# Altium PCB SIM_NB_IoT.PcbDoc
Units mil, origin at the board's own origin, x right, y up, seen from the top; angles counter-clockwise.
Board outline 1968.5 x 1968.5 mil, 2 copper layers (Top Layer, Bottom Layer); 33 components, 30 nets, 142 pads, 16 vias.
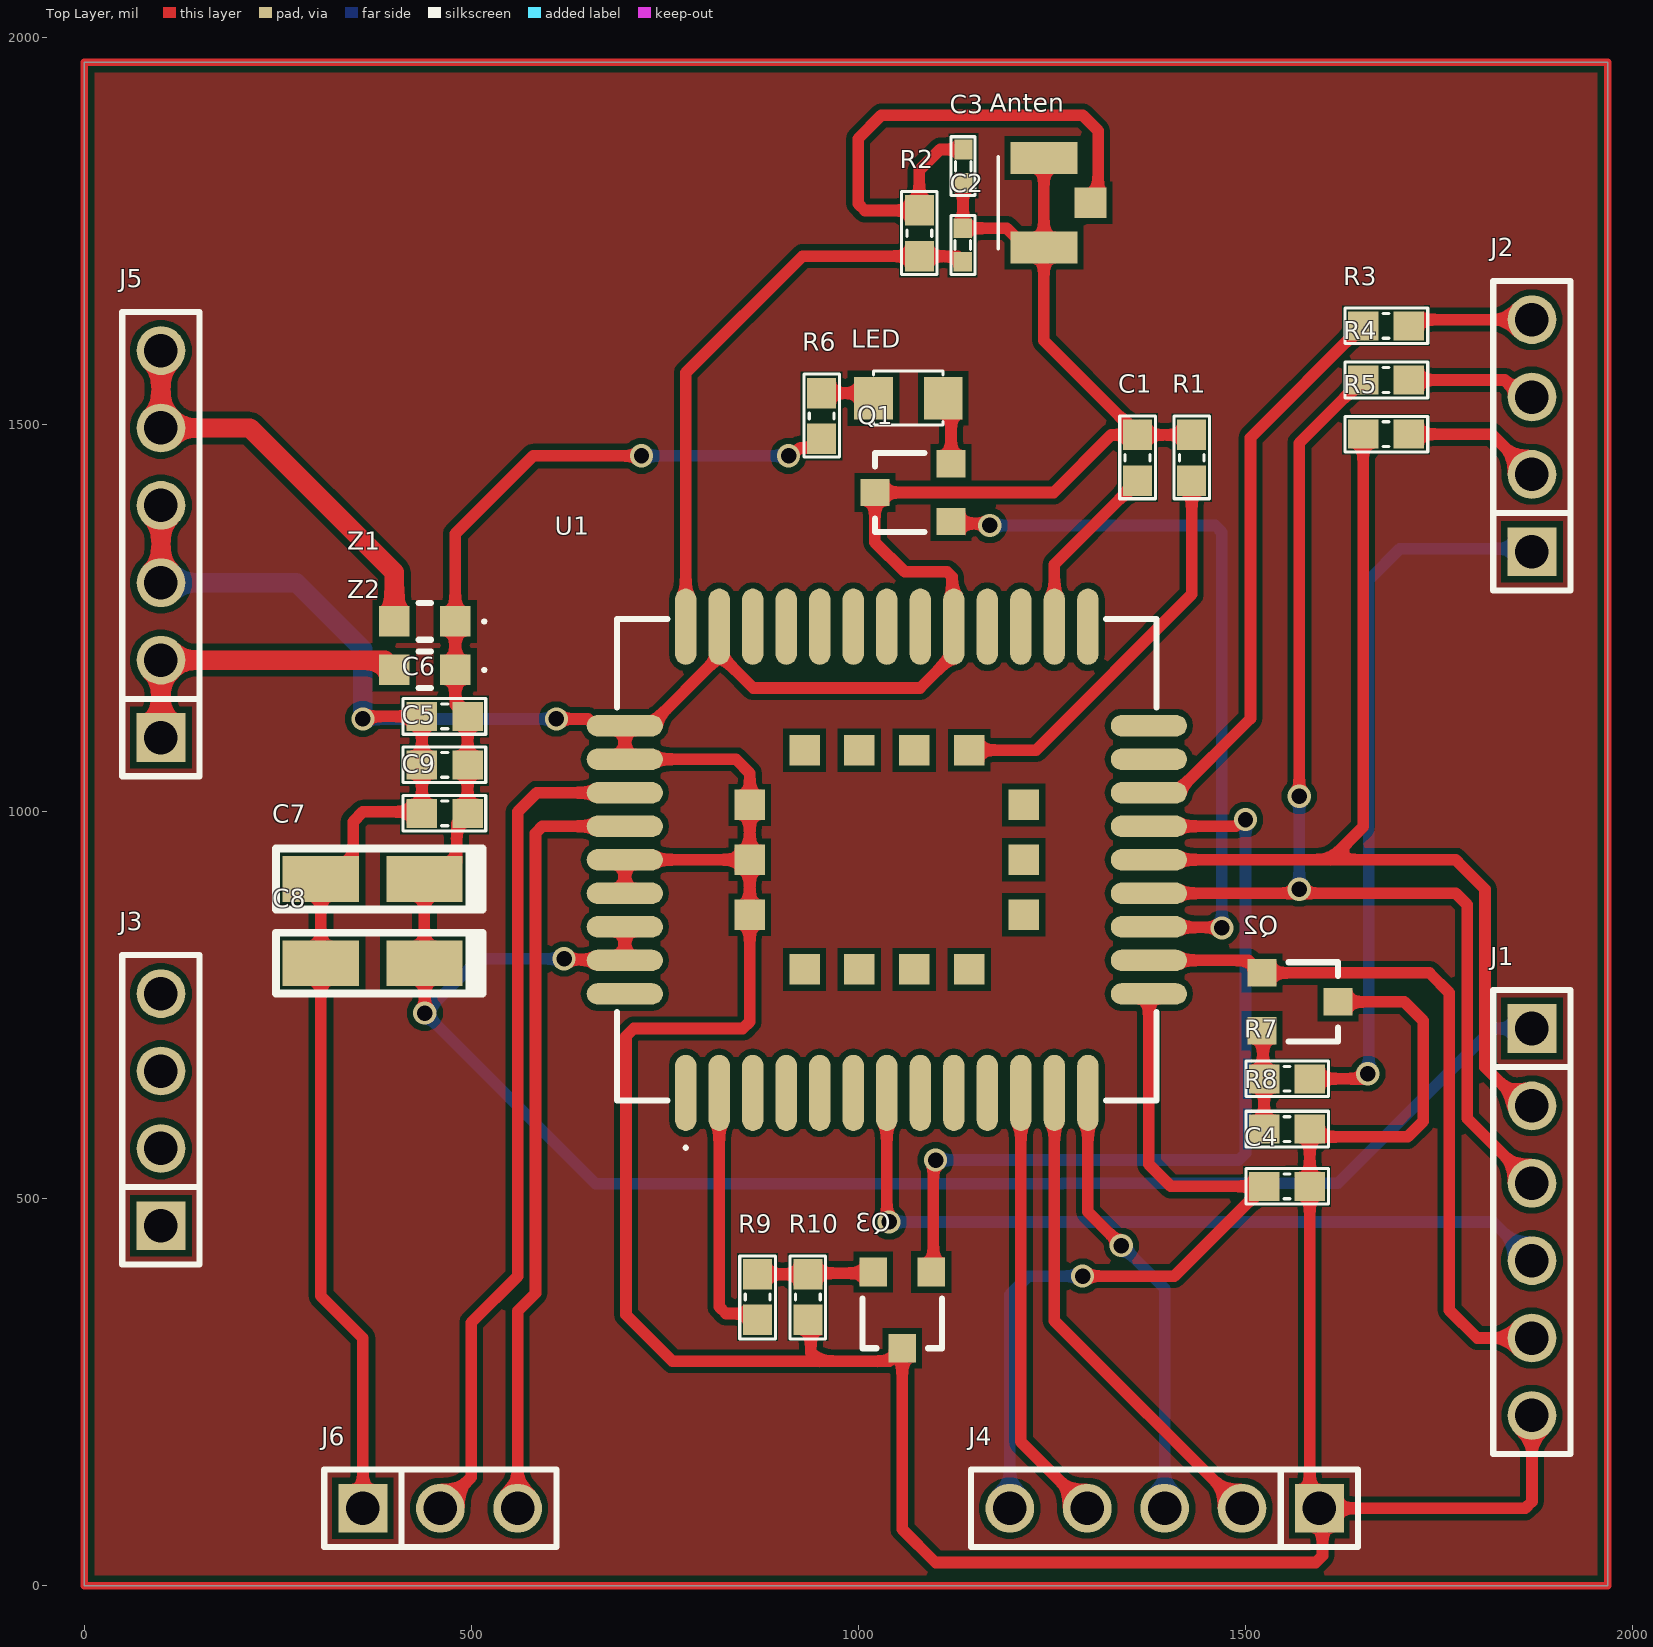
[diagram p0: Top Layer view]
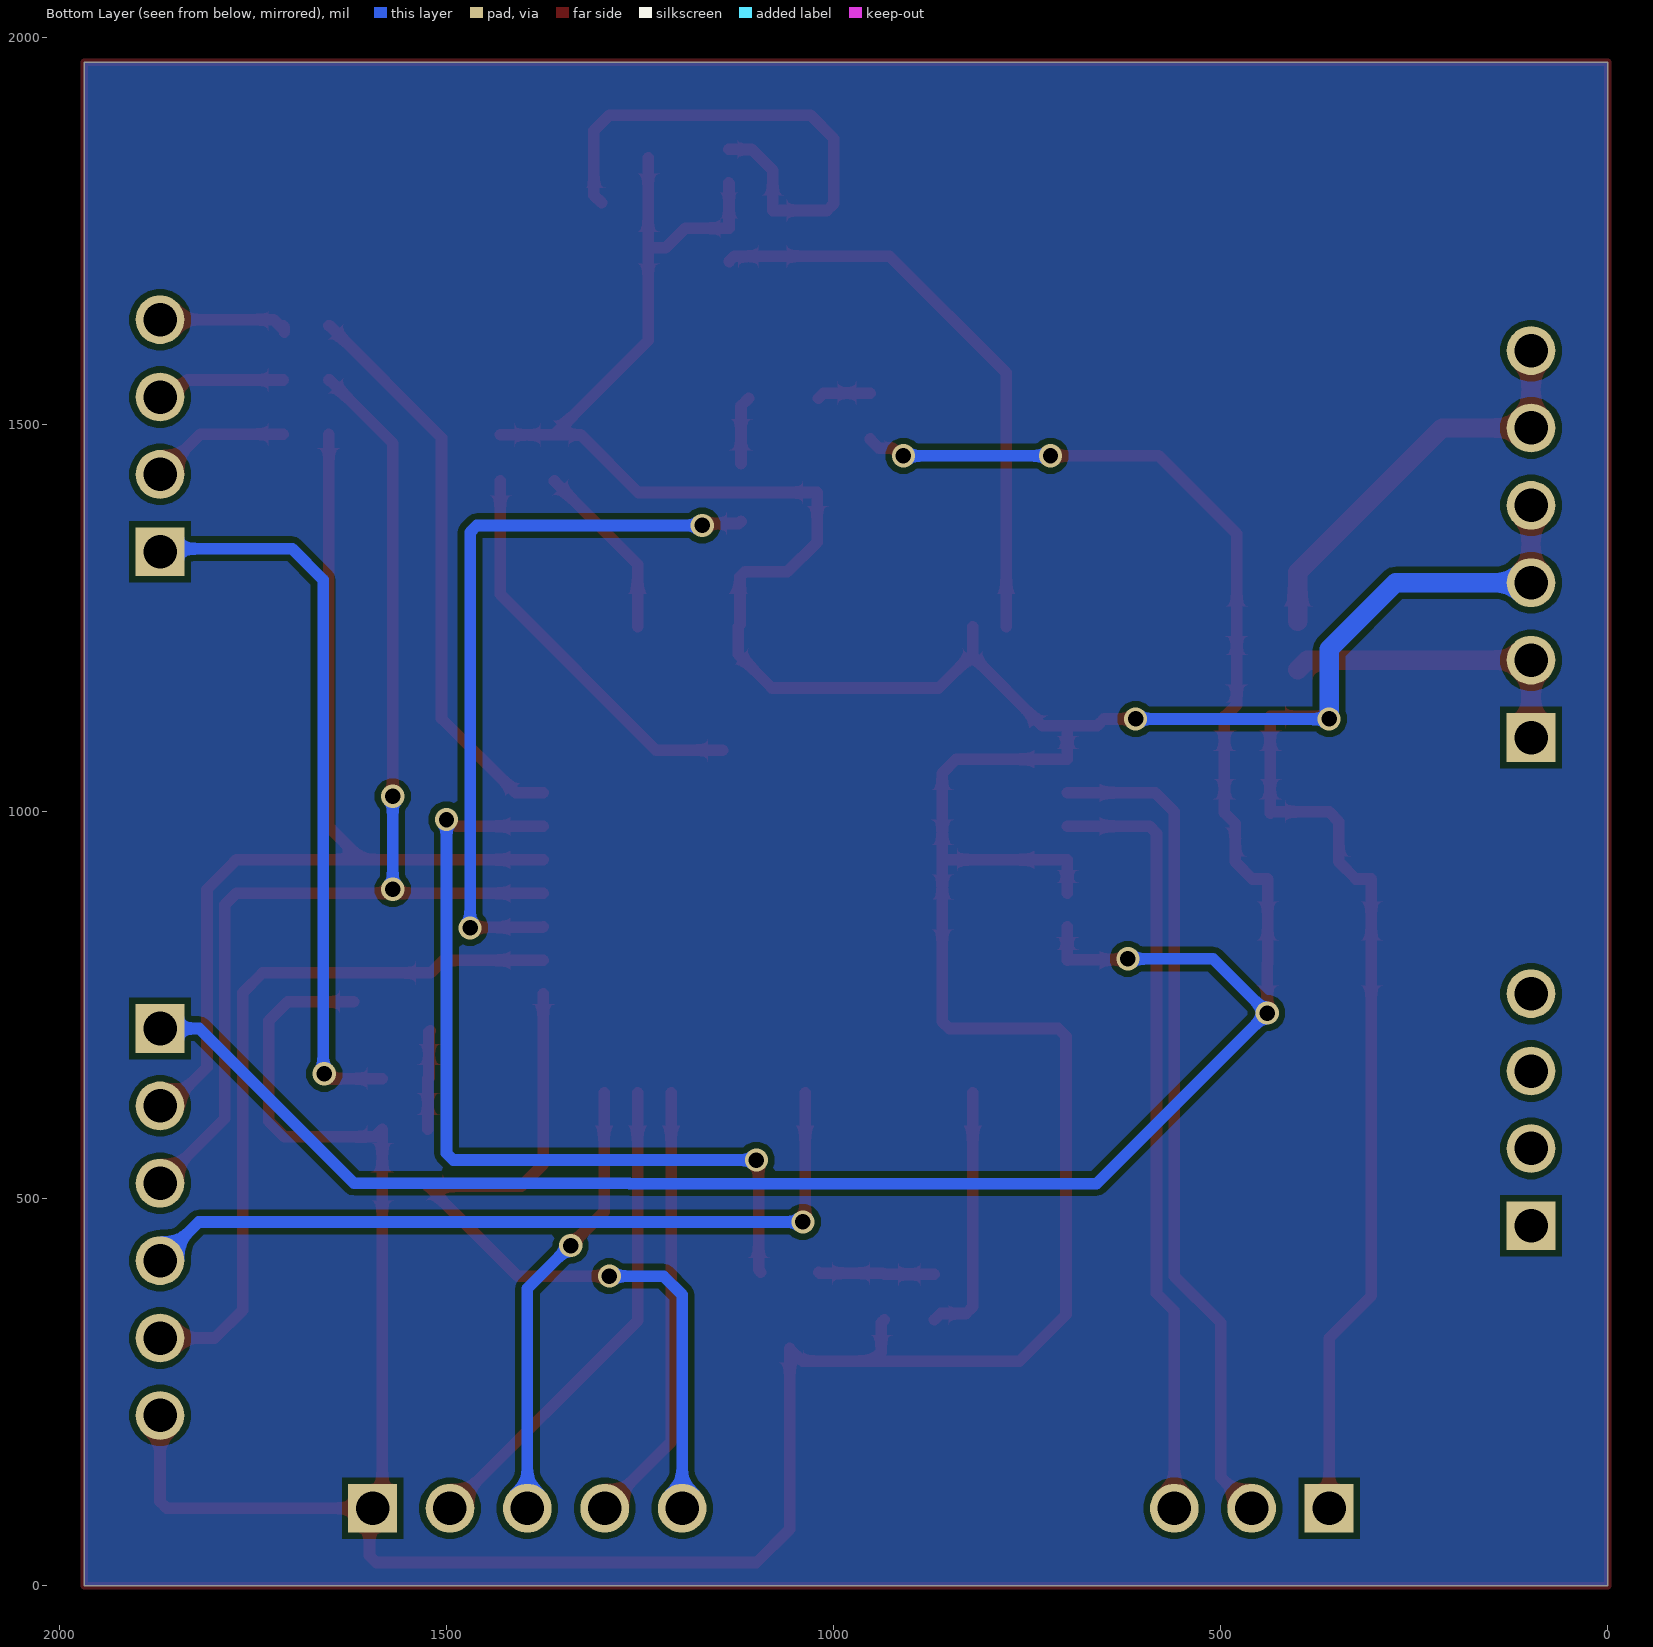
[diagram p1: Bottom Layer view, seen from below]
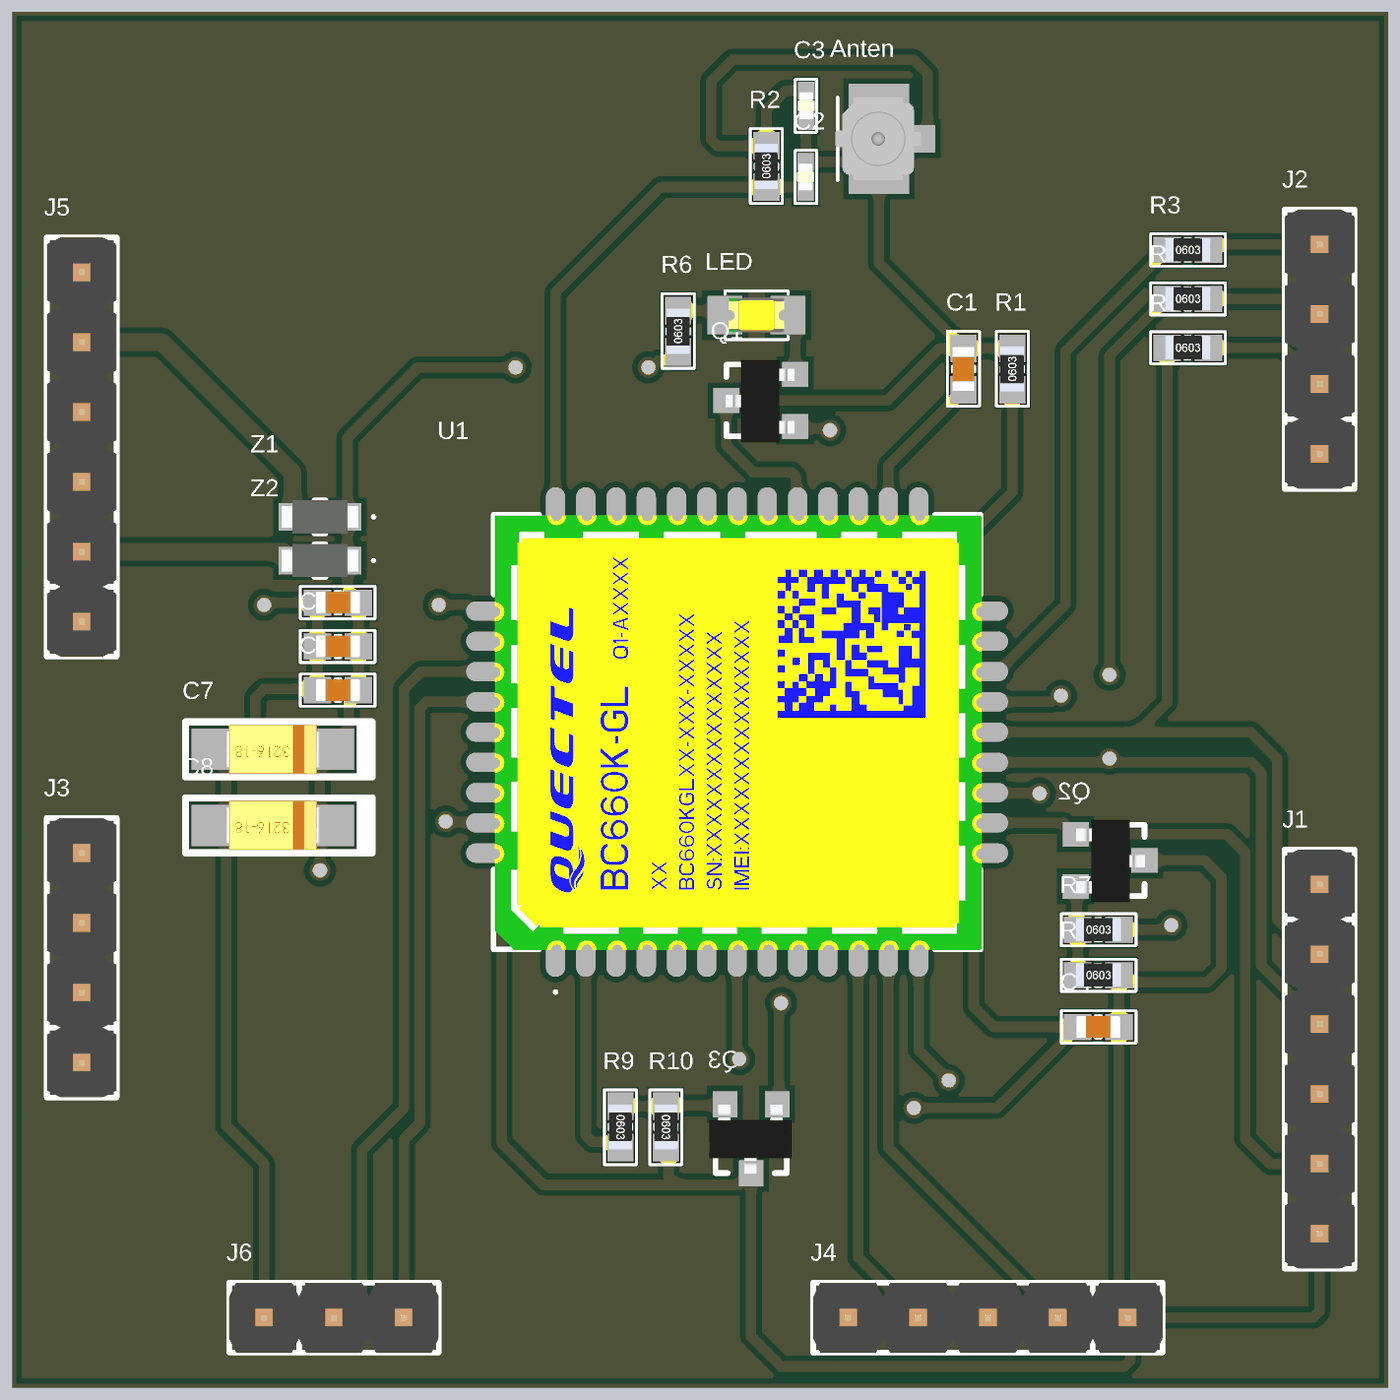
[diagram p2: 3D render of the assembled board from above, using the file's embedded part models]

## Layer stack, top to bottom
Top Solder: solder mask 0.4, Solder Resist, Dk 3.5
Top Layer: signal copper 1.4
Dielectric 1: dielectric 12.6, FR-4, Dk 4.8
Bottom Layer: signal copper 1.4
Bottom Solder: solder mask 0.4, Solder Resist, Dk 3.5

## Board outline
0,0 0,1968.5 1968.5,1968.5 1968.5,0

## Design rules (kind name [scope] priority, off if disabled: settings)
Clearance Clearance_1 [InPolygon] p1: gap=8 ignorepadtopadclearanceinfootprint=FALSE
Clearance [All] p2: gap=8 ignorepadtopadclearanceinfootprint=FALSE
PolygonConnect [All] p1: connectstyle=Relief reliefconductorwidth=10 reliefentries=4 polygonreliefangle="90 Angle" airgapwidth=10
RoutingVias [All] p1: holewidth=28 width=50 viastyle="Through Hole" minholewidth=10 minwidth=15 maxholewidth=20 maxwidth=30
SolderMaskExpansion [IsVia] p1: expansion=4 istentingtop=TRUE
Width [All] p1: maxlimit=25 minlimit=10 preferedwidth=15
30 further rules are at their usual default settings.

## Components (designator, comment, footprint, x,y, rotation, side; value= is the part's Value field where it differs from the comment)
Anten "1909763" TE_1909763-1 1240,1787 r90 top
C1 "105/50V/0603" "tu 0603" 1361,1457.53 r90 top
C2 "220nF" "tu 0402" 1135,1732.5 r270 top
C3 "220nF" "tu 0402" 1136,1834.35 r90 top
C4 "104/50V/0603" "tu 0603" 1554,516 r0 top
C5 "104/25V/0603" "tu 0603" 465.71,1060.64 r180 top
C6 "22pF/25V/0603" "tu 0603" 465.71,1123.28 r180 top
C7 "100uF/6.3V/2312" "tu tantalum smd3216" 372.54,913.23 r180 top
C8 "100uF/6.3V/2312" "tu tantalum smd3216" 372.54,804.49 r180 top
C9 "101/50V/0603" "tu 0603" 465.71,998 r180 top
J1 "JP 1x6 2.54" "JP 1x6 DT" 1870.67,720 r270 top
J2 "JP 1x4 2.54" "JP 1x4 DT" 1870.67,1336 r90 top
J3 "JP 1x4 2.54" "JP 1x4 DT" 99.02,465 r90 top
J4 "JP 1x5 2.54" "JP 1x5 DT" 1596,100 r180 top
J5 "JP 1x6 2.54" "JP 1x6 DT" 99,1096 r90 top
J6 "JP 1x3 2.54" "JP 1x3 DT" 360,100 r0 top
LED "LED 0805" LED-0805-Yellow 1019.79,1534.6 r0 top
Q1 "HF" SOT23#1 1070.79,1412.6 r90 top value=C9014
Q2 "HF" SOT23#2 1570.91,754.4 r90 top value=C9014
Q3 "HF" SOT23#2 1057,356 r0 top value=C9014
R1 "1001/0603" "tro smd 0603" 1431,1457.53 r90 top
R2 "0R0/0402" "tro smd 0603" 1079,1747.53 r90 top
R3 "1001/0603" "tro smd 0603" 1682,1628 r0 top
R4 "1001/0603" "tro smd 0603" 1682,1558 r0 top
R5 "1001/0603" "tro smd 0603" 1682,1488 r0 top
R6 "1001/0603" "tro smd 0603" 952.79,1511.6 r90 top
R7 "1001/0603" "tro smd 0603" 1554,655 r0 top
R8 "1002/0603" "tro smd 0603" 1554,590 r0 top
R9 "1001/0603" "tro smd 0603" 870,372.91 r270 top
R10 "1002/0603" "tro smd 0603" 935,372.91 r270 top
U1 "BC660K-GL" BC660KGL 1037,938 r90 top
Z1 "MU2029-151Y" MU2029151Y 440,1246 r180 top
Z2 "MU2029-151Y" MU2029151Y 440,1183.36 r180 top

## Footprints (in the part's own frame and the unit in brackets; to place one, negate y for a bottom-side part, rotate by r counter-clockwise, add the part's x,y. Pads: shape width x height; smd on the part's side, far side on the other; paste and mask are expansions set on the pad)
BC660KGL [mm]
  oval 2.5x0.7 smd: 1(-7.65,6.6) 2(-7.65,5.5) 3(-7.65,4.4) 4(-7.65,3.3) 5(-7.65,2.2) 6(-7.65,1.1) 7(-7.65,0) 8(-7.65,-1.1) 9(-7.65,-2.2) 10(-7.65,-3.3) 11(-7.65,-4.4) 12(-7.65,-5.5) 13(-7.65,-6.6) 23(7.65,-6.6) 24(7.65,-5.5) 25(7.65,-4.4) 26(7.65,-3.3) 27(7.65,-2.2) 28(7.65,-1.1) 29(7.65,0) 30(7.65,1.1) 31(7.65,2.2) 32(7.65,3.3) 33(7.65,4.4) 34(7.65,5.5) 35(7.65,6.6)
  oval 0.7x2.5 smd: 14(-4.4,-8.6) 15(-3.3,-8.6) 16(-2.2,-8.6) 17(-1.1,-8.6) 18(0,-8.6) 19(1.1,-8.6) 20(2.2,-8.6) 21(3.3,-8.6) 22(4.4,-8.6) 36(4.4,8.6) 37(3.3,8.6) 38(2.2,8.6) 39(1.1,8.6) 40(0,8.6) 41(-1.1,8.6) 42(-2.2,8.6) 43(-3.3,8.6) 44(-4.4,8.6)
  rect 1x1 smd: 45(-3.6,2.7) 46(-3.6,0.9) 47(-3.6,-0.9) 48(-3.6,-2.7) 49(-1.8,-4.5) 50(0,-4.5) 51(1.8,-4.5) 52(3.6,-2.7) 53(3.6,-0.9) 54(3.6,0.9) 55(3.6,2.7) 56(1.8,4.5) 57(0,4.5) 58(-1.8,4.5)
  silkscreen extent -9.5,-8.85 7.9,8.85, body extent -7.93,-8.89 7.87,8.81, height 1.98
"JP 1x3 DT" [mm]
  rect 1.6x1.6 hole 1.1: 1(0,0)
  round 1.6 hole 1.1: 2(2.54,0) 3(5.08,0)
  silkscreen extent -1.27,-1.27 6.35,1.27, body extent -1.27,-1.27 6.35,1.27, height 8.54
"JP 1x4 DT" [mm] "4 pins, 1 row, straight, gold plating"
  rect 1.6x1.6 hole 1.1: 1(0,0)
  round 1.6 hole 1.1: 2(2.54,0) 3(5.08,0) 4(7.62,0)
  silkscreen extent -1.27,-1.27 8.89,1.27, body extent -1.27,-1.27 8.89,1.27, height 8.54
"JP 1x5 DT" [mm] "5 pins, 1 row, straight, gold plating"
  rect 1.6x1.6 hole 1.1: 1(0,0)
  round 1.6 hole 1.1: 2(2.54,0) 3(5.08,0) 4(7.62,0) 5(10.16,0)
  silkscreen extent -1.27,-1.27 11.43,1.27, body extent -1.27,-1.27 11.43,1.27, height 8.54
"JP 1x6 DT" [mm] "6 pins, 1 row, straight, gold plating"
  rect 1.6x1.6 hole 1.1: 1(0,0)
  round 1.6 hole 1.1: 2(2.54,0) 3(5.08,0) 4(7.62,0) 5(10.16,0) 6(12.7,0)
  silkscreen extent -1.27,-1.27 13.97,1.27, body extent -1.27,-1.27 13.97,1.27, height 8.54
LED-0805-Yellow [mil]
  rect 50x55 smd: 1(0,0) 2(90,0)
  silkscreen extent 0,-35 90,35, body extent 5,-25 85,25, height 43
MU2029151Y [mm]
  rect 1x1 smd: 1(-1,0) 2(1,0)
  silkscreen extent -2,-0.6 0.2,0.6, body extent -1.4,-0.6 1.4,0.6, height 1.2
SOT23#1 [mm] "SOT23"
  rect 0.9x0.95 smd: 1(-0.95,-1.25) 2(0,1.25)
  rect 0.9x0.95 smd mask+0: 3(0.95,-1.25)
  silkscreen extent -1.3,-0.38 1.3,1.25, body extent -1.52,-1.23 1.48,1.27, height 1.06
SOT23#2 [mm] "SOT23"
  rect 0.9x0.95 smd: 1(-0.95,1.25) 2(0,-1.25)
  rect 0.9x0.95 smd mask+0: 3(0.95,1.25)
  silkscreen extent -1.3,-1.25 1.3,0.38, body extent -1.52,-1.27 1.48,1.23, height 1.06
TE_1909763-1 [mm]
  rect 1x1.05 smd: 1(0,-1.525)
  rect 1.05x2.2 smd: 2(-1.475,0) 3(1.475,0)
  silkscreen extent -1.5,1.5 1.5,1.5, body extent -1.5,-1.53 1.5,1.58, height 1.27
"tro smd 0603" [mm] "Chip Capacitor, 2-Leads, Body 1,60x0,80mm, IPC Medium Density"
  rect 1x0.95 smd mask+0.076: 1(-0.75,0) 2(0.75,0)
  silkscreen extent -1.35,-0.58 1.37,0.58, body extent -0.82,-0.42 0.82,0.43, height 0.44
"tu 0402" [mm]
  rect 0.65x0.6 smd: 1(-0.55,0) 2(0.55,0)
  silkscreen extent -0.97,-0.38 0.97,0.41, body extent -0.5,-0.27 0.5,0.26, height 0.35
"tu 0603" [mm] "Chip Capacitor, 2-Leads, Body 1,60x0,80mm, IPC Medium Density"
  rect 1x0.95 smd mask+0.076: 1(-0.75,0) 2(0.75,0)
  silkscreen extent -1.35,-0.58 1.37,0.58, body extent -0.8,-0.4 0.8,0.4, height 0.9
"tu tantalum smd3216" [mm]
  rect 2.5x1.5 smd: 1(-1.7,0) 2(1.7,0)
  silkscreen extent -3.61,-1 3.17,1, body extent -1.7,-0.9 1.7,0.9, height 1.69

## Part data
Anten: library part Antenna, "VAO ITEM, MINI RF HEADER", Package=None, Availability=Unavailable, MP=1909763-1, Price=None
C1 C4 C5 C6 C9: library part "Tu 0603 563 16V 10%", "Dán", Chung_Loai=Dán, Don_Vi=Con, Ma_Hang=MH004573, So_Chan=2, Ten_Linh_Kien="Tụ 0603 563-56nF 10% 16V"
C2 C3: library part "Tu 0402 220nF 6.3V 20%", "Dán", Chung_Loai=Dán, Don_Vi=Con, Ma_Hang=MH008102, So_Chan=2, Ten_Linh_Kien="Tụ 0402 220nF 6.3V 20%"
C7 C8: library part "Tu tantalum 10uF 16V SMD3216", "Dán", Chung_Loai=Dán, Don_Vi=Con, Ma_Hang=MH001954, So_Chan=2, Ten_Linh_Kien="Tụ tantalum 106C-10uF 16V SMD3216"
J1 J5: library part "JP 1x6 2.54 Duc Thang", "Cắm", Chung_Loai=Cắm, Don_Vi=Con, Ma_Hang=MH000903, Ten_Linh_Kien="Jump Đơn Đực 2.54MM 1x40P Thẳng 11MM"
J2 J3: library part "JP 1x4 2.54 Duc Thang", "Cắm", Chung_Loai=Cắm, Don_Vi=Con, Ma_Hang=MH000903, Ten_Linh_Kien="Jump Đơn Đực 2.54MM 1x40P Thẳng 11MM"
J4: library part "JP 1x5 2.54 Duc Thang", "Cắm", Chung_Loai=Cắm, Don_Vi=Con, Ma_Hang=MH000903, Ten_Linh_Kien="Jump Đơn Đực 2.54MM 1x40P Thẳng 11MM"
J6: library part "JP 1x3 2.54 Duc Thang", "Cắm", Chung_Loai=Cắm, Don_Vi=Con, Ma_Hang=MH000903, Ten_Linh_Kien="Jump Đơn Đực 2.54MM 1x40P Thẳng 11MM"
LED: library part "LED 0805 Trang", "Dán", Chung_Loai=Dán, Don_Vi=Con, Ma_Hang=MH002946, Ten_Linh_Kien="LED 0805 Màu Trắng ( White)"
Q1 Q2 Q3: library part "C1815 HF SMD", "NPN transistor"
R1 R2 R3 R4 R5 R6 R7 R8 R9 R10: library part "Tro 0603 5% 510R", "Dán", Chung_Loai=Dán, Don_Vi=Con, Ma_Hang=MH007667, So_Chan=2, Ten_Linh_Kien="Trở 0603 5% 510R"
U1: "Compact NB-IoT Module with Ultra-low Power Consumption LTE Cat NB2 2.2V to 4.3V 16.7kbps/158.5kbps 58-Pin LCC - Tape and Reel", Manufacturer_Name=Quectel, Datasheet Link=https://www.quectel.com/wp-content/uploads/2021/04/Quectel_BC660K-GL_Hardware_Design_V1.0.pdf, Geometry.Height=2.2mm, Manufacturer_Part_Number=BC660K-GL
Z1 Z2: "150 Ohms @ 100 MHz 1 Power, Signal Line Ferrite Bead 0805 (2012 Metric) 800mA 200mOhm", Manufacturer_Name=Bourns, Mouser Part Number=652-MU2029-151Y, Arrow Part Number=MU2029-151Y, Arrow Price/Stock=https://www.arrow.com/en/products/mu2029-151y/bourns, Datasheet Link=https://www.bourns.com/docs/Product-Datasheets/mgmumz.pdf, Geometry.Height=1.1mm, Manufacturer_Part_Number=MU2029-151Y, Mouser Price/Stock=https://www.mouser.co.uk/ProductDetail/Bourns/MU2029-151Y?qs=9FzDyaD7ZFCqd2lEExIVWQ%3D%3D

## Via types
v1: diameter 30, hole 20, Top Layer to Bottom Layer, tented both sides, 16 vias

## Nets (pads, with @x,y where several pads share a name; then routed paths per layer and width w, separated by ;. In a path a pad name is that pad's centre, name@x,y a point inside that pad or via, vN(x,y) a via of type N, cw(c..) or ccw(c..) an arc to the next point about the centre after c; other vN are vias at no path point)
+3.3V_MAIN: J5.1 J5.2 Z2.2 | length 406.9
  Top Layer w25: J5.1 J5.2 387.99,1196 Z2.2
+3.8V_MAIN: J5.5 J5.6 Z1.2 | length 542.3
  Top Layer w25: J5.6 J5.5 214,1496 400.63,1309.37 Z1.2
ANT_MAIN: C2.2 R2.1 U1.35 | length 751.8
  Top Layer w15: U1.35 777.16,1567.16 928,1718 R2.1 1128.83,1718 1135,1711.83 C2.2
BOOT: J1.4 U1.7 | length 1019.4
  Top Layer w15: U1.7 1037,473 v1(1040,470)
  Bottom Layer w15: v1(1040,470) 1820.67,470 J1.4
DBG_RXD: J6.2 U1.38 | length 1090
  Top Layer w15: J6.2 500,140 500,340 560,400 560,1000 584.61,1024.61 U1.38
DBG_TXD: J6.3 U1.39 | length 1001.1
  Top Layer w15: J6.3 560,354.99 583,377.99 583,972.52 591.79,981.31 U1.39
GND: Anten.2 Anten.3 C1.2 C2.1 C3.1 C4.2 C5.2 C6.2 C7.2 C8.2 C9.2 J1.6 J4.1 J5.3 J5.4 J6.1 Q1.2 Q2.2 Q3.2 R1.2 R8.2 R10.2 U1.27 U1.34 U1.36 U1.37 U1.40 U1.41 U1.56 U1.57 U1.58 | length 7776.7
  Top Layer w15: J6.1 360,320 305.61,374.39 C8.2 C7.2 325.29,913.23 347.32,935.25 347.32,987.32 360,1000 434.18,1000 C9.2 C5.2 C6.2 363.28,1123.28 v1(360,1120) ; v1(610,1120) 650.81,1120 659.59,1111.23 U1.36 ; U1.41 U1.40 U1.57 ; U1.34 U1.34@820.46,1203.75 ; R10.2 938.8,339.59 938.8,301.2 950,290 ; Q3.2 Q3.2@1057,305.8 ; C3.1 1135.5,1812.19 1135.5,1754.65 C2.1 1192.14,1754.15 1217.36,1728.93 Anten.2 ; Anten.3 Anten.2 ; R1.2 C1.2 ; Q2.2 1705.6,754.4 1730,730 1730,600 1710,580 1593.53,580 R8.2 C4.2 1583.53,112.47 J4.1 ; J1.6 1870.67,108.79 1861.88,100 J4.1 ; U1.36 U1.37 842.08,1067.92 860,1050 860,1009.03 U1.56 U1.57 ; U1.36 730.9,1111.23 820.46,1200.8 U1.34@820.46,1203.75 ; U1.34@820.46,1203.75 864.21,1160 1079.87,1160 1123.61,1203.75 U1.27 1121.21,1241.58 1121.21,1303.62 1114.83,1310 1060,1310 1021.57,1348.43 Q1.2 1252.6,1412.6 1327.06,1487.06 C1.2 ; U1.57 U1.58 859.83,728.79 851.05,720 710,720 700,710 700,350 760,290 950,290 ; 950,290 1040.21,290 1045.8,295.59 1046.78,295.59 Q3.2@1057,305.8 ; Q3.2@1057,305.8 1057,73 1100,30 1591.21,30 1600,38.79 1600,96 J4.1 ; Anten.2 1240,1609.04 1361,1488.04 C1.2
  Top Layer w25: J5.3 J5.4
  Bottom Layer w15: v1(360,1120) v1(610,1120)
  Bottom Layer w25: J5.3 274,1296 360,1210 v1(360,1120)
MAIN_RXD: J1.2 R5.1 U1.18 | length 1329.1
  Top Layer w15: U1.18 1610,938 ; R5.1 1652.47,980.47 1610,938 ; J1.2 1860,620 1810,670 1810,900 1779.99,930.01 1772,938 1610,938
MAIN_TXD: J1.3 R4.1 U1.17 | length 1504.9
  Top Layer w15: U1.17 1772.31,894.69 1787,880 1787,603.67 J1.3 ; v1(1570,1020) 1570,1476.51 1651.49,1558 R4.1
  Bottom Layer w15: v1(1570,900) v1(1570,1020)
NetAnten_1: Anten.1 C3.2 R2.2 | length 714.8
  Top Layer w15: C3.2 1106,1856 1079,1829 R2.2 1008.79,1777.06 1000,1785.84 1000,1870 1030,1900 1290,1900 1310,1880 1310,1796.96 Anten.1
NetJ2_2: J2.2 R5.2 | length 180.7
  Top Layer w15: R5.2 1818.67,1488 J2.2
NetJ2_3: J2.3 R4.2 | length 168.3
  Top Layer w15: R4.2 1835.68,1558 1857.68,1536 J2.3
NetJ2_4: J2.4 R3.2 | length 175
  Top Layer w15: R3.2@1710,1620 R3.2@1710,1622.29 ; R3.2 1710,1626.47 R3.2@1710,1622.29 ; J2.4 1723.71,1636 R3.2@1710,1622.29
NetLED_1: LED.1 R6.2 | length 69.7
  Top Layer w15: R6.2 1013.26,1541.13 LED.1
NetLED_2: LED.2 Q1.3 | length 88.8
  Top Layer w15: LED.2 1120,1524.39 Q1.3
NETLIGHT: Q1.1 U1.16 | length 962
  Top Layer w15: Q1.1 1122.6,1372.6 1167.4,1372.6 v1(1170,1370) ; U1.16 1376.28,850.69 1469.31,850.69 v1(1470,850)
  Bottom Layer w15: v1(1170,1370) 1461.21,1370 1470,1361.21 v1(1470,850)
NetQ2_1: Q2.1 R7.1 R8.1 | length 128.1
  Top Layer w15: Q2.1 1523.09,715.61 1523.09,656.39 R7.1 R8.1
NetQ3_1: Q3.1 R9.1 R10.1 | length 150.7
  Top Layer w15: R9.1 R10.1 936.39,403.83 1018.21,403.83 Q3.1
NetR1_1: R1.1 U1.52 | length 518.1
  Top Layer w15: U1.52 1229.73,1079.73 1431,1281 R1.1
PSM_EINT: Q3.3 U1.19 | length 1111
  Top Layer w15: Q3.3 1097.2,408.01 1097.2,547.2 v1(1100,550) ; U1.19 1487.75,981.31 1496.44,990 v1(1500.5,990)
  Bottom Layer w15: v1(1100,550) 1491.71,550 1500.5,558.79 v1(1500.5,990)
RESET_MODULE_NB: J2.1 R7.2 | length 945.6
  Top Layer w15: R7.2 1647.81,655 1654.37,661.57 v1(1658.43,661.57)
  Bottom Layer w15: v1(1658.43,661.57) 1660,663.13 1660,1300 1700,1340 1866.67,1340 J2.1
RESET_N: J1.5 Q2.3 U1.15 | length 937.4
  Top Layer w15: U1.15 1504.44,808.08 1520.72,791.8 Q2.3 1738.2,791.8 1764,766 1764,356 1800,320 J1.5
RI: R3.1 U1.20 | length 739.4
  Top Layer w15: U1.20 1411.02,1024.61 1507,1120.6 1507,1483.51 1651.49,1628 R3.1
TESTPOINT: R9.2 U1.2 | length 333
  Top Layer w15: U1.2 820.46,360.46 829.25,351.68 861.71,351.68 R9.2
USIM_CLK: J4.3 U1.13 | length 578.2
  Top Layer w15: U1.13 1296.84,483.16 1340,440 v1(1340,439.5)
  Bottom Layer w15: v1(1340,439.5) 1340.5,439.5 1396,384 J4.3
USIM_DATA: J4.4 U1.11 | length 572.3
  Top Layer w15: U1.11 1210.23,185.77 J4.4
USIM_RST: J4.2 U1.12 | length 637.3
  Top Layer w15: U1.12 1253.54,342.46 J4.2
USIM_VDD: C4.1 J4.5 U1.14 | length 1044.1
  Top Layer w15: v1(1290,400) 1408.47,400 1512.29,503.82 1512.29,504.8 1523.49,516 C4.1 1404,516 1375.58,544.42 U1.14
  Bottom Layer w15: J4.5 1196,376 1220,400 v1(1290,400)
VBAT: C5.1 C6.1 C7.1 C8.1 C9.1 J1.1 R6.1 U1.42 U1.43 Z1.1 Z2.1 | length 3122.8
  Top Layer w15: v1(440,740) 440,803.95 C8.1 C7.1 459.15,913.23 481.18,935.25 481.18,984.93 495.24,998.98 C5.1 C6.1 494.25,1123.28 479.37,1138.16 Z2.1 Z1.1 479.37,1359.37 580,1460 v1(720,1460) ; v1(620,810) 620.96,809.04 697.46,809.04 U1.43 U1.42 ; v1(910,1460) 914.06,1460 923.94,1469.89 941.59,1469.89 952.79,1481.09 R6.1
  Bottom Layer w15: v1(620,810) 510,810 v1(440,740) 660.5,519.5 1263.84,519.5 1264.34,520 1620,520 1820,720 J1.1 ; v1(720,1460) v1(910,1460)
VDD_EXT: C1.1 U1.24 | length 233.3
  Top Layer w15: U1.24 1253.54,1319.55 1361,1427.02 C1.1
pads on no net: J3.1 J3.2 J3.3 J3.4 U1.1 U1.3 U1.4 U1.5 U1.6 U1.8 U1.9 U1.10 U1.21 U1.22 U1.23 U1.25 U1.26 U1.28 U1.29 U1.30 U1.31 U1.32 U1.33 U1.44 U1.45 U1.46 U1.47 U1.48 U1.49 U1.50 U1.51 U1.53 U1.54 U1.55
copper on no net: | length 7874
  Top Layer w10: 0,0 0,1968.5 1968.5,1968.5 1968.5,0 0,0

## Polygon pours and split planes (outlines as drawn)
no net on Top Layer "NONET_L01_P000" (solid, pour order 0): 0,1968.5 1968.5,1968.5 1968.5,0 0,0
no net on Bottom Layer "NONET_L02_P001" (solid, pour order 1): 0,1968.5 1968.5,1968.5 1968.5,0 0,0